# Altium PCB PCB1.PcbDoc
Units mil, origin at the board's own origin, x right, y up, seen from the top; angles counter-clockwise.
Board outline 3910 x 1560 mil, 2 copper layers (Top Layer, Bottom Layer); 44 components, 36 nets, 141 pads, 20 vias.
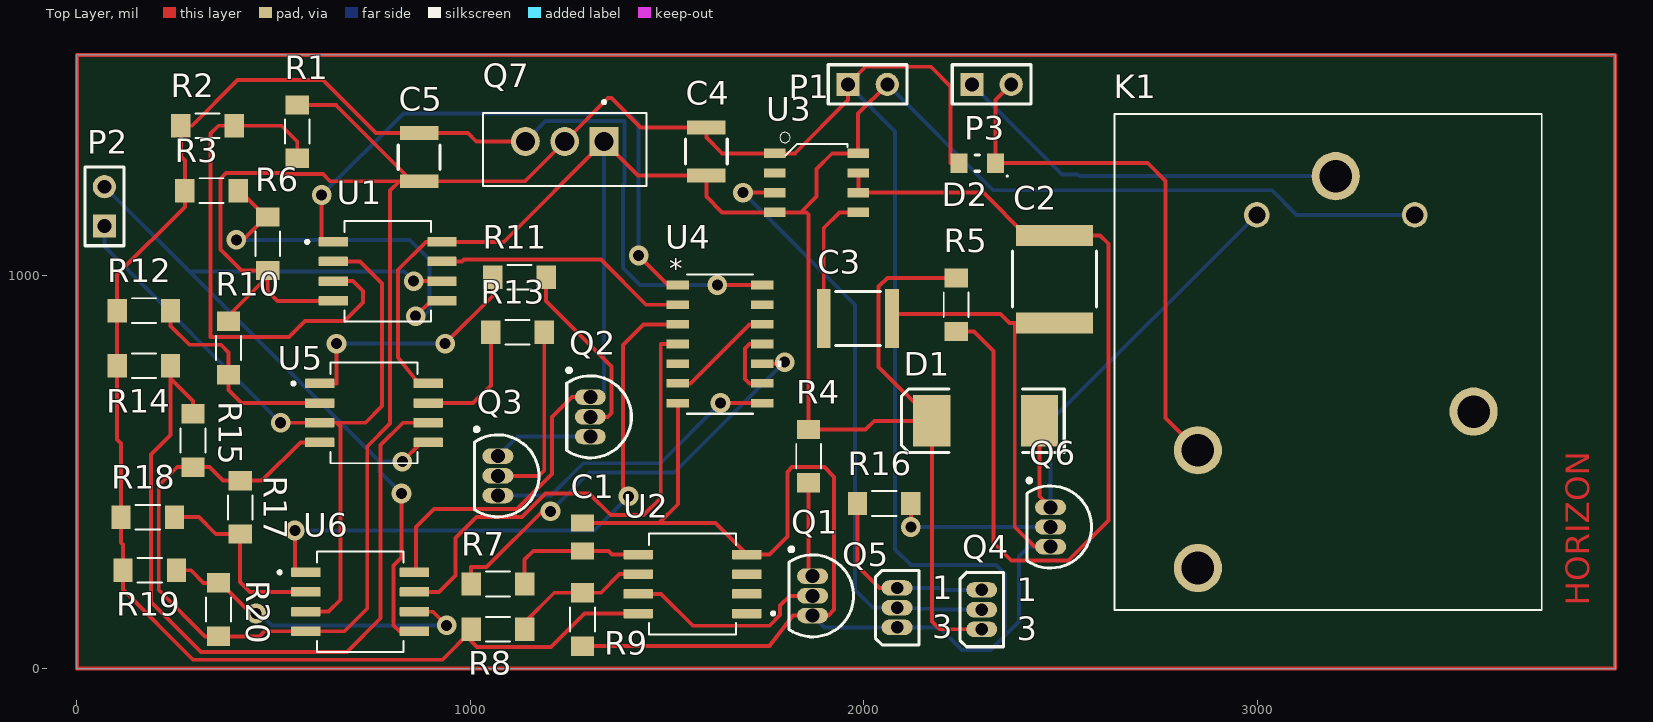
[diagram p0: Top Layer view]
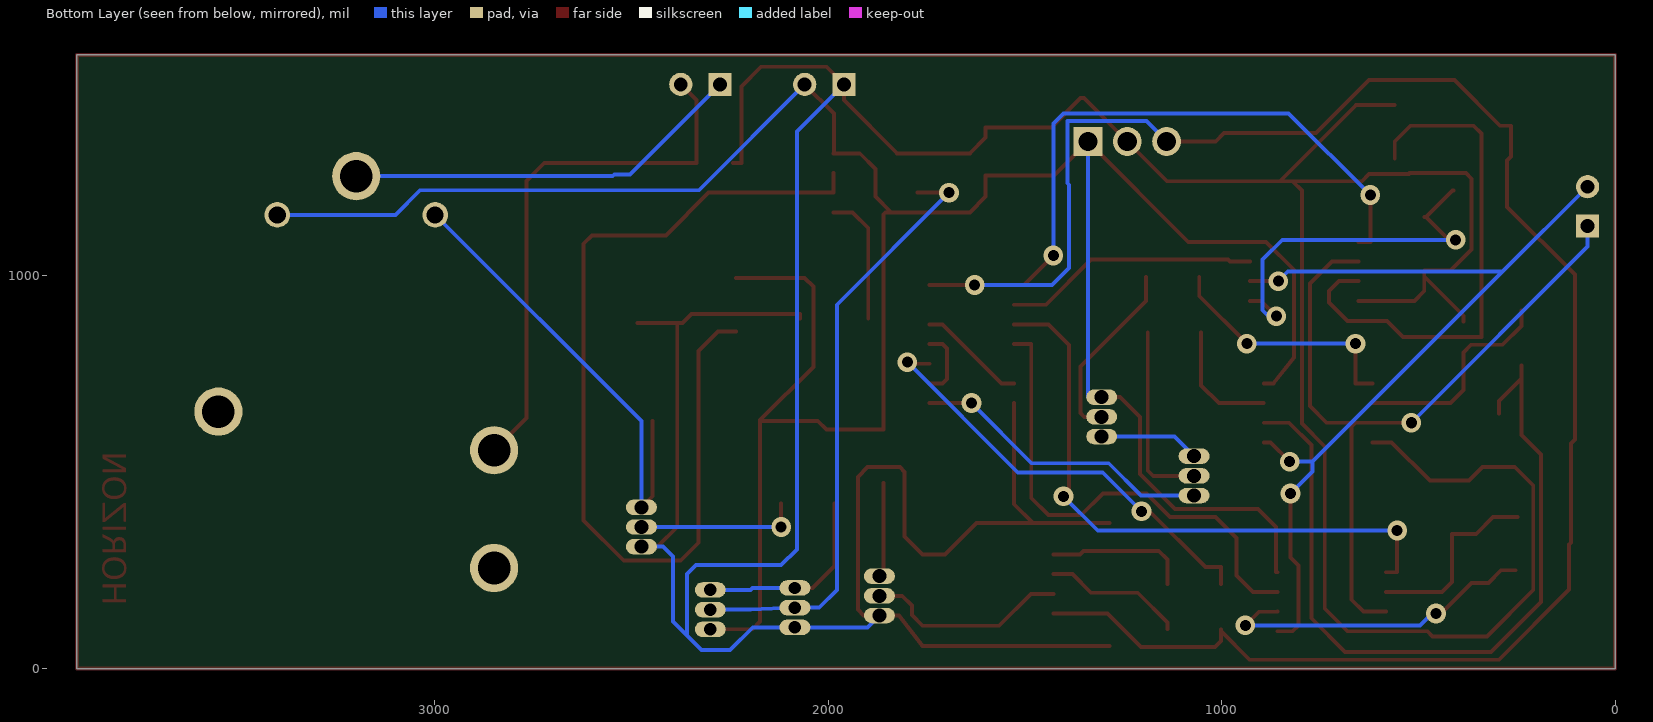
[diagram p1: Bottom Layer view, seen from below]
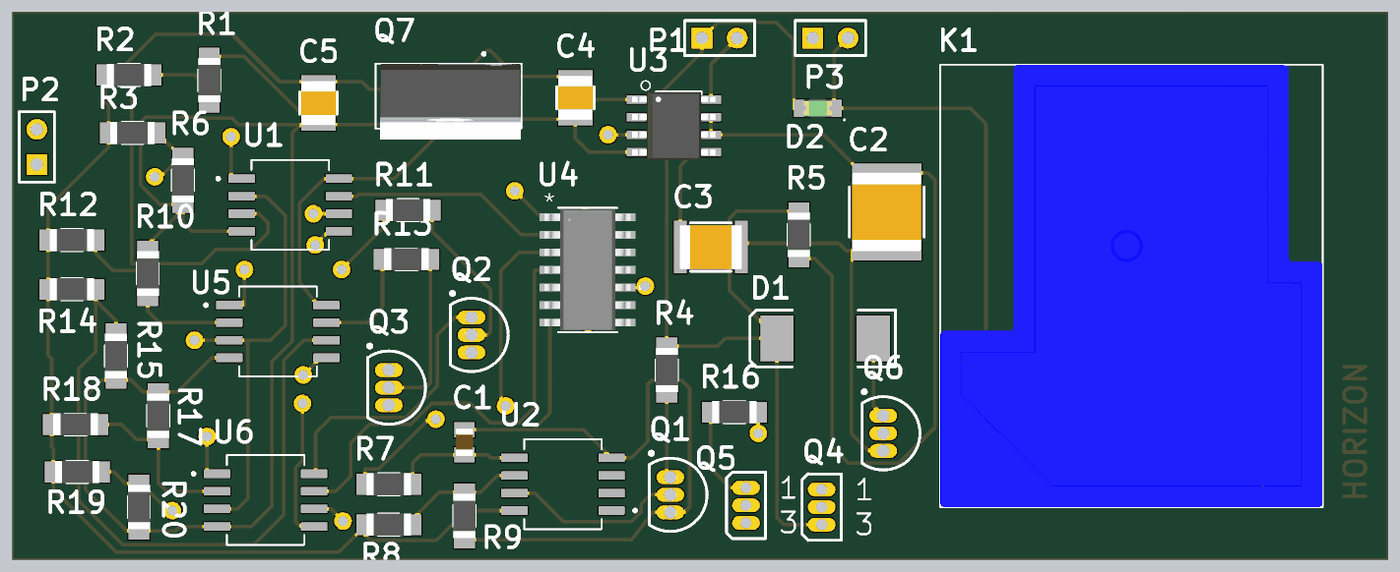
[diagram p2: 3D render of the assembled board from above, using the file's embedded part models]

## Layer stack, top to bottom
Top Solder: solder mask 0.4, Solder Resist, Dk 3.5
Top Layer: signal copper 1.4
Dielectric 1: dielectric 12.6, FR-4, Dk 4.8
Bottom Layer: signal copper 1.4
Bottom Solder: solder mask 0.4, Solder Resist, Dk 3.5

## Board outline
0,0 3910,0 3910,1560 0,1560

## Design rules (kind name [scope] priority, off if disabled: settings)
Clearance [All] p1: gap=10 ignorepadtopadclearanceinfootprint=FALSE
ComponentClearance [All] p1: gap=10 collisioncheckmode=3 verticalgap=0 showdistances=FALSE
PolygonConnect [All] p1: connectstyle=Relief reliefconductorwidth=10 reliefentries=4 polygonreliefangle="90 Angle" airgapwidth=10
RoutingVias [All] p1: holewidth=28 width=50 viastyle="Through Hole" minholewidth=28 minwidth=50 maxholewidth=28 maxwidth=50
SolderMaskExpansion [All] p1: expansion=4 istentingtop=FALSE
Width [All] p1: maxlimit=10 minlimit=10 preferedwidth=10
29 further rules are at their usual default settings.

## Components (designator, comment, footprint, x,y, rotation, side; value= is the part's Value field where it differs from the comment)
C1 "GRM21BR60J107ME15K" CAPC2012X145N 1285,334.57 r90 top
C2 "10uF" WCAP-CSGP_2220_L5.7W5H2.8 2485,990 r90 top
C3 "10nF" WCAP-CSGP_1812_L4.5W3.2H1.25 1985,890 r0 top
C4 "220nF" WCAP-CSGP_1210_L3.2W2.5H0.95 1600,1315 r270 top
C5 "100nF" WCAP-CSGP_1210_L3.2W2.5H0.95 870,1300 r90 top
D1 "Diode" SMC 2310,630 r180 top
D2 "Kingbright Green LED, 70 mcd 120 ° 0805" LED1913X12NGREEN 2288.74,1285 r180 top
K1 "SLA-12VDC-SL-C" RELAY_SLA-12VDC-SL-C 3200,555 r180 top
P1 "12v Header" HDR1X2 1960,1485 r0 top
P2 "Sensors Header" HDR1X2 70,1125 r90 top
P3 "BSPD out" HDR1X2 2275,1485 r0 top
Q1 "NPN" TO-226-AA 1870,185 r180 top
Q2 "NPN" TO-226-AA 1305,640 r180 top
Q3 "NPN" TO-226-AA 1070,490 r180 top
Q4 "PMOS" E3 2300,150 r0 top
Q5 "NMOS" E3 2085,155 r0 top
Q6 "NPN" TO-226-AA 2475,360 r180 top
Q7 "LM7805CT/NOPB" TO254P1054X470X1955-3 1240,1340 r180 top
R1 "ERJU08J274V" RES_ERJU08J274V 560,1365 r90 top
R2 "ERJU08J274V" RES_ERJU08J274V 332.09,1380 r0 top
R3 "ERJU08J274V" RES_ERJU08J274V 342.09,1215 r0 top
R4 "ERJU08J274V" RES_ERJU08J274V 1860,540 r90 top
R5 "ERJU08J274V" RES_ERJU08J274V 2235,925 r90 top
R6 "ERJU08J274V" RES_ERJU08J274V 485,1080 r270 top
R7 "ERJU08J274V" RES_ERJU08J274V 1070,215 r0 top
R8 "ERJU08J274V" RES_ERJU08J274V 1070,100 r0 top
R9 "ERJU08J274V" RES_ERJU08J274V 1285,125 r270 top
R10 "ERJU08J274V" RES_ERJU08J274V 385,815 r90 top
R11 "ERJU08J274V" RES_ERJU08J274V 1125,995 r0 top
R12 "ERJU08J274V" RES_ERJU08J274V 170,910 r0 top
R13 "ERJU08J274V" RES_ERJU08J274V 1120,855 r0 top
R14 "ERJU08J274V" RES_ERJU08J274V 170,770 r0 top
R15 "ERJU08J274V" RES_ERJU08J274V 295,580 r270 top
R16 "ERJU08J274V" RES_ERJU08J274V 2052.09,420 r180 top
R17 "ERJU08J274V" RES_ERJU08J274V 415,410 r90 top
R18 "ERJU08J274V" RES_ERJU08J274V 180,385 r0 top
R19 "ERJU08J274V" RES_ERJU08J274V 185,250 r0 top
R20 "ERJU08J274V" RES_ERJU08J274V 360,150 r270 top
U1 "LM358PSR" SOIC127P780X200-8N 790,1010 r0 top
U2 "LM358PSR" SOIC127P780X200-8N 1565,215 r180 top
U3 "CLOCK-NE555DR" SOIC8-1.27-5X4MM 1880,1235 r270 top
U4 "SN74HCS4075QDRQ1" SOIC14_D_TEX 1635,825 r0 top
U5 "LM358PSR" SOIC127P780X200-8N 755,650 r0 top
U6 "LM358PSR" SOIC127P780X200-8N 720,170 r0 top

## Footprints (in the part's own frame and the unit in brackets; to place one, negate y for a bottom-side part, rotate by r counter-clockwise, add the part's x,y. Pads: shape width x height; smd on the part's side, far side on the other; paste and mask are expansions set on the pad)
CAPC2012X145N [mm]
  rect 1.11x1.47 smd: 1(-0.9,0) 2(0.9,0)
  body extent -1,-0.63 1,0.63, height 1.45
E3 [mm] "TO, Flat Index; 3 In-Line, Axial Leads; Body Dia. 4.6mm; Lead Dia. 0.5 mm (max)"
  oval 2x1 hole 0.8: 1(0,1.27) 2(0,0) 3(0,-1.27)
  silkscreen extent -1.41,-2.41 1.41,2.41
HDR1X2 [mm] "Connector; Header; 2 Position"
  rect 1.5x1.5 hole 0.9: 1(0,0)
  round 1.5 hole 0.9: 2(2.54,0)
  silkscreen extent -1.27,-1.27 3.81,1.27
LED1913X12NGREEN [mm] "LED 2-Leads, Body 1.90x1.32mm, IPC Medium Density"
  rect 1.1x1.25 smd: 1(-1.175,0) 2(1.175,0)
  silkscreen extent -1.99,-0.53 0.15,0.89, body extent -1.01,-0.62 1.01,0.63, height 1.1
RELAY_SLA-12VDC-SL-C [mm]
  round 1.65 hole 1.1: C1(-5.1,-15.2) C2(5.1,-15.2)
  round 3.116 hole 2.1: COM1(0,-17.7) COM2(-8.9,-2.5) NC(8.9,7.6) NO(8.9,0)
  silkscreen extent -13.3,-21.7 14.3,10.3, body extent -13.3,-21.7 14.3,10.3, height 20.4
RES_ERJU08J274V [mm]
  rect 1.25x1.5 smd: 1(-1.725,0) 2(1.725,0)
  silkscreen extent -0.78,-0.8 0.78,0.8, body extent -1.6,-0.8 1.6,0.8, height 0.6
SMC [mm] "DO-214-AB/SMC; 2 C-Bend Leads; Body 7.9 x 5.9 mm, inc. leads (LxW)"
  rect 2.4x3.3 smd: 1(-3.475,0) 2(3.475,0)
  silkscreen extent -5.08,-2.05 5.42,2.06
SOIC8-1.27-5X4MM [mm]
  rect 0.6x1.4 smd: 1(-1.905,-2.7) 2(-0.635,-2.7) 3(0.635,-2.7) 4(1.905,-2.7) 5(1.905,2.7) 6(0.635,2.7) 7(-0.635,2.7) 8(-1.905,2.7)
  silkscreen extent -3.25,-2.36 -1.77,2, body extent -2.45,-3 2.45,3, height 1.75
SOIC14_D_TEX [mil]
  rect 57.5x22 smd paste+0 mask+0: 1(-107.25,150) 2(-107.25,100) 3(-107.25,50) 4(-107.25,0) 5(-107.25,-50) 6(-107.25,-100) 7(-107.25,-150) 8(107.25,-150) 9(107.25,-100) 10(107.25,-50) 11(107.25,0) 12(107.25,50) 13(107.25,100) 14(107.25,150)
  silkscreen extent -84,-177 156,177, body extent -122,-172 122,172, height 69
SOIC127P780X200-8N [mm]
  rrect15% 1.9x0.61 smd: 1(-3.505,1.905) 2(-3.505,0.635) 3(-3.505,-0.635) 4(-3.505,-1.905) 5(3.505,-1.905) 6(3.505,-0.635) 7(3.505,0.635) 8(3.505,1.905)
  silkscreen extent -5.3,-3.25 2.8,3.25
TO254P1054X470X1955-3 [mm]
  rect 1.86x1.86 hole 1.24: 1(-2.54,0)
  round 1.86 hole 1.24: 2(0,0) 3(2.54,0)
  silkscreen extent -5.27,-2.64 5.27,2.86, body extent -5.21,-2.56 4.95,3.67, height 15.59
TO-226-AA [mm] "TO, Flat Index; 3 In-Line, Axial Leads; Body Dia. 4.8mm; Leads 0.55 x 0.51 mm (max)"
  oval 2x1 hole 0.9: 1(0,-1.27) 2(0,0) 3(0,1.27)
  silkscreen extent -2.65,-3.13 1.52,2.65, body extent -2.65,-2.66 1.52,2.66, height 5.33
WCAP-CSGP_1210_L3.2W2.5H0.95 [mm] "Ceramic Capacitors, body 3.2x2.5mm"
  rect 0.9x2.5 smd: 1(-1.55,0) 2(1.55,0)
  silkscreen extent -0.8,-1.35 0.8,1.35, body extent -1.6,-1.25 1.6,1.25, height 0.95
WCAP-CSGP_1812_L4.5W3.2H1.25 [mm] "Ceramic Capacitors, body 4.5x3.2mm"
  rect 0.9x3.8 smd: 1(-2.2,0) 2(2.2,0)
  silkscreen extent -1.45,-1.75 1.45,1.75, body extent -2.25,-1.6 2.25,1.6, height 1.25
WCAP-CSGP_2220_L5.7W5H2.8 [mm] "Ceramic Capacitors, body 5.70x5.00mm"
  rect 1.35x5 smd: 1(-2.825,0) 2(2.825,0)
  silkscreen extent -1.8,-2.7 1.8,2.7, body extent -2.85,-2.5 2.85,2.5, height 2.8

## Part data
C1: "0805 100 uF 6.3 V Â±20% Tolerance X7S Multilayer Ceramic Chip Capacitor", Package="2012 Murata", Availability="In Stock", Check_prices=https://www.snapeda.com/parts/GRM21BR60J107ME15K/Murata%20Electronics%20North%20America/view-part/1845859/?ref=eda, MF="Murata Electronics", MP=GRM21BR60J107ME15K, Price=None, SnapEDA_Link=https://www.snapeda.com/parts/GRM21BR60J107ME15K/Murata%20Electronics%20North%20America/view-part/1845859/?ref=snap
C2: library part 885012214006, "WCAP-CSGP Multilayer Ceramic Chip Capacitor, General Purpose, size 2220, X7R Class II, 10uF, 100VDC", Capacitance Tolerance=+/-10%, Case/Size Code=2220, Insulation Resistance=0.01GOhm, Manufacturer="Wurth Elektronik", Operating Temperature Max=125°C, Operating Temperature Min=-55°C, Rated Voltage (DC)=100V, Capacitance=10uF, Category="Multilayer Ceramic Chip Capacitors", Ceramic Type="X7R Class II", ComponentLink1Description="Website Link", ComponentLink1URL=https://www.we-online.com/redexpert/article/885012214006?ad, ComponentLink2Description="Datasheet Link", ComponentLink2URL=https://www.we-online.com/redexpert/spec/885012214006?ad, Dissipation Factor=2.5%, Height=2.8mm, Length=5.7mm, Manufacturer Part Number=885012214006, Match Code=WCAP-CSGP, Mount="Surface Mount", Packaging="Tape and Reel", Technical Reference=X7R2220106K100DFCT10000, Width=5mm
C3: library part 885012210019, "WCAP-CSGP Multilayer Ceramic Chip Capacitor, General Purpose, size 1812, X7R, 10nF, 50VDC", Capacitance Tolerance=+/-10%, Case/Size Code=1812, Insulation Resistance=10GOhm, Manufacturer="Wurth Elektronik", Operating Temperature Max=125°C, Operating Temperature Min=-55°C, Rated Voltage (DC)=50V, Capacitance=10nF, Category="Multilayer Ceramic Chip Capacitors", Ceramic Type=X7R, ComponentLink1Description="Website Link", ComponentLink1URL=https://www.we-online.com/redexpert/article/885012210019?ad, ComponentLink2Description="Datasheet Link", ComponentLink2URL=https://www.we-online.com/redexpert/spec/885012210019?ad, Dissipation Factor=2.5%, Height=1.25mm, Length=4.5mm, Manufacturer Part Number=885012210019, Match Code=WCAP-CSGP, Mount="Surface Mount", Packaging="Tape and Reel", Technical Reference=X7R1812103K050DFCT10000, Width=3.2mm
C4: library part 885012209020, "WCAP-CSGP Multilayer Ceramic Chip Capacitor, General Purpose, size 1210, X7R, 220nF, 25VDC", Capacitance Tolerance=+/-10%, Case/Size Code=1210, Insulation Resistance=2.3GOhm, Manufacturer="Wurth Elektronik", Operating Temperature Max=125°C, Operating Temperature Min=-55°C, Rated Voltage (DC)=25V, Capacitance=220nF, Category="Multilayer Ceramic Chip Capacitors", Ceramic Type=X7R, ComponentLink1Description="Website Link", ComponentLink1URL=https://www.we-online.com/redexpert/article/885012209020?ad, ComponentLink2Description="Datasheet Link", ComponentLink2URL=https://www.we-online.com/redexpert/spec/885012209020?ad, Dissipation Factor=3.5%, Height=0.95mm, Length=3.2mm, Manufacturer Part Number=885012209020, Match Code=WCAP-CSGP, Mount="Surface Mount", Packaging="Tape and Reel", Technical Reference=X7R1210224K025DFCT10000, Width=2.5mm
C5: library part 885012209019, "WCAP-CSGP Multilayer Ceramic Chip Capacitor, General Purpose, size 1210, X7R, 100nF, 25VDC", Capacitance Tolerance=+/-10%, Case/Size Code=1210, Insulation Resistance=5GOhm, Manufacturer="Wurth Elektronik", Operating Temperature Max=125°C, Operating Temperature Min=-55°C, Rated Voltage (DC)=25V, Capacitance=100nF, Category="Multilayer Ceramic Chip Capacitors", Ceramic Type=X7R, ComponentLink1Description="Website Link", ComponentLink1URL=https://www.we-online.com/redexpert/article/885012209019?ad, ComponentLink2Description="Datasheet Link", ComponentLink2URL=https://www.we-online.com/redexpert/spec/885012209019?ad, Dissipation Factor=3.5%, Height=0.95mm, Length=3.2mm, Manufacturer Part Number=885012209019, Match Code=WCAP-CSGP, Mount="Surface Mount", Packaging="Tape and Reel", Technical Reference=X7R1210104K025DFCT10000, Width=2.5mm
D1: "Default Diode", Code_JEDEC=DO-214-AB, LatestRevisionDate=17-Jul-2002, LatestRevisionNote="Re-released for DXP Platform.", PackageDescription="DO-214-AB/SMC; 2 C-Bend Leads; Body 7.9 x 5.9 mm, inc. leads (LxW)", PackageReference=SMC, PackageVersion=Sep-1996, Published=8-Jun-2000, Publisher="Altium Limited"
D2: Color=Green, Forward Voltage="2.1 V", Manufacturer=KingBright, Manufacturer Part No.=KP-2012MGC, Creator="Ritesh Kanjee", Datasheet URL=http://za.rs-online.com/web/p/visible-leds/4663778/, Date Created="18 February 2015", RS Stock No.=466-3778
K1: "SUBMINATURE HIGH POWER RELAY", Package=None, Availability="Not in stock", Check_prices=https://www.snapeda.com/parts/SLA-12VDC-SL-C/Songle+Relay/view-part/?ref=eda, MF="Songle Relay", MP=SLA-12VDC-SL-C, Price=None, SnapEDA_Link=https://www.snapeda.com/parts/SLA-12VDC-SL-C/Songle+Relay/view-part/?ref=snap
P1 P2 P3: library part "Header 2", "Header, 2-Pin", LatestRevisionDate=17-Jul-2002, LatestRevisionNote="Re-released for DXP Platform.", Publisher="Altium Limited"
Q1 Q2 Q3 Q6: "NPN Bipolar Transistor", Code_JEDEC=TO-226-AA, LatestRevisionDate=17-Jul-2002, LatestRevisionNote="Re-released for DXP Platform.", PackageDescription="TO, Flat Index; 3 In-Line, Axial Leads; Body Dia. 4.8mm; Leads 0.55 x 0.51 mm (max)", PackageReference=TO-226-AA, Published=8-Jun-2000, Publisher="Altium Limited"
Q4: library part MOSFET-P, "P-Channel MOSFET", LatestRevisionDate=17-Jul-2002, LatestRevisionNote="Re-released for DXP Platform.", PackageDescription="TO, Flat Index; 3 In-Line, Axial Leads; Body Dia. 4.6mm; Lead Dia. 0.5 mm (max)", PackageReference=E3, PackageVersion=1995/1996, Published=8-Jun-2000, Publisher="Altium Limited"
Q5: library part MOSFET-N, "N-Channel MOSFET", LatestRevisionDate=17-Jul-2002, LatestRevisionNote="Re-released for DXP Platform.", PackageDescription="TO, Flat Index; 3 In-Line, Axial Leads; Body Dia. 4.6mm; Lead Dia. 0.5 mm (max)", PackageReference=E3, PackageVersion=1995/1996, Published=8-Jun-2000, Publisher="Altium Limited"
Q7: Package=None, Availability=Unavailable, MP=LM7805CT/NOPB, Price=None
R1 R2 R3 R4 R5 R6 R7 R8 R9 R10 R11 R12 R13 R14 R15 R16 R17 R18 R19 R20: "1206 anti-sulfurated resistor 1206 Anti-Sulfurated", Package="3216-2 Panasonic", Check_prices=https://www.snapeda.com/parts/ERJ-U08J274V/Panasonic/view-part/?ref=eda, MF=Panasonic, MP=ERJ-U08J274V, SnapEDA_Link=https://www.snapeda.com/parts/ERJ-U08J274V/Panasonic/view-part/?ref=snap
U1 U2 U5 U6: "General Purpose Amplifier 2 Circuit 8-SO", Package="SO-8 Texas Instruments", Availability=Unavailable, MF="Texas Instruments", MP=LM358PSR, Price=None, SnapEDA_Link=https://www.snapeda.com/parts/LM358PSR/Texas%20Instruments/view-part/501080/?ref=snap
U3: library part CLOCK-NE555DR(SOIC8), "Single Precision Timer", Package="SOIC-8 Texas Instruments", Check_prices=https://www.snapeda.com/parts/NE555DR/Texas+Instruments/view-part/?ref=eda, MF="Texas Instruments", MP=NE555DR, SnapEDA_Link=https://www.snapeda.com/parts/NE555DR/Texas+Instruments/view-part/?ref=snap
U4: "No Description Available", Mfr_Name="Texas Instruments", RefDes=RefDes, Type=Logic

## Via types
v1: diameter 50, hole 28, Top Layer to Bottom Layer, 20 vias

## Nets (pads, with @x,y where several pads share a name; then routed paths per layer and width w, separated by ;. In a path a pad name is that pad's centre, name@x,y a point inside that pad or via, vN(x,y) a via of type N, cw(c..) or ccw(c..) an arc to the next point about the centre after c; other vN are vias at no path point)
+5: C5.2 Q7.3 R2.1 R3.1 R8.1 R12.1 R14.1 R18.1 R19.1 U2.8 U4.14 | length 4760.2
  Top Layer w10: Q7.3 1015.02,1340 994,1361.02 C5.2 760,1361.02 625.02,1496 408,1496 292,1380 R2.1 264.17,1302 274.17,1292 R3.1 274.17,1173.91 102.09,1001.83 R12.1 R14.1 102.09,582 112.09,572 R18.1 112.09,320 117.09,315 R19.1 117.09,200.86 295.47,22.48 929.49,22.48 1002.09,95.08 R8.1 1002.09,70 1017.09,55 1205,55 1290,140 U2.8 ; v1(1628,975) U4.14
  Bottom Layer w10: Q7.3 1191.62,1391.62 1392,1391.62 1392,1234 1388,1230 1388,1018 1431,975 v1(1628,975)
+12: C4.2 D1.2 K1.C1 P1.2 Q2.1 Q4.3 Q7.1 R4.2 R5.2 U1.8 U3.4 U3.8 U5.8 U6.8 | length 7138.8
  Top Layer w10: U6.8 862,245 862,360 907.31,405.31 1118.31,405.31 1208,495 1208,640 1258,690 Q2.1 ; U5.8 868,725 816,791 816,1014 887,1085 U1.8 1085,1085 Q7.1 1426.02,1253.98 C4.2 ; C4.2 1600.05,1200 1640.05,1160 U3.4 1840,1160 ; U3.8 U3.8@1986,1310 ; P1.2 1986,1411 U3.8@1986,1310 ; R5.2 2060,992.91 2038,970.91 2038,766.81 2173.19,631.62 D1.2 ; Q4.3 2193,100 2173.19,119.81 D1.2 ; 1840,1160 1880,1200 1880,1270 1920,1310 U3.8@1986,1310 ; 1840,1160 1855,1160 1860,1155 R4.2 2005,607.91 2027.09,630 D1.2
  Bottom Layer w10: Q2.1 1340,690 Q7.1 ; P1.2 2329,1216 3038,1216 3100.57,1153.43 K1.C1
BPs: P2.2 U1.6 U5.5 U6.5 | length 2291.4
  Top Layer w10: v1(825,445) 825,282.09 805,262.09 805,110 820,95 U6.5 ; v1(827,526) 876,575 U5.5 ; v1(856,985) U1.6
  Bottom Layer w10: P2.2 286,1009 ; v1(825,445) 769,501 769,526 ; v1(827,526) 769,526 ; v1(856,985) 832,1009 286,1009 ; 286,1009 769,526
Cs: P2.1 U1.2 U5.3 U6.3 | length 1974.1
  Top Layer w10: v1(518,625) U5.3 660,625 ; U6.3 640,145 670,175 670,615 660,625 ; U1.2 720,1035 776,979 776,668 733,625 660,625
  Bottom Layer w10: P2.1 70,1073 v1(518,625)
GND: C1.2 C2.1 C3.2 C4.1 C5.1 D2.2 P1.1 Q1.3 Q5.3 Q6.3 Q7.2 R1.2 R6.2 R9.2 R10.2 R15.2 R17.2 R20.2 U1.4 U2.4 U3.1 U4.7 U5.4 U6.4 | length 11760
  Top Layer w10: R10.2 385,897 R6.2@485,997 ; R1.2 658,1432.91 C5.1@851.94,1238.98 ; U5.4 568,575 470.91,477.91 R17.2 371.17,477.91 337,512.09 R15.2 255.09,512.09 208,465 208,200 325.91,82.09 R20.2 464,82.09 476.91,95 U6.4 680,95 738,153 738,565 796,623 796,1214.98 820,1238.98 ; U1.4 510,935 485,960 R6.2@485,997 ; R9.2 1760,57.09 1820,135 Q1.3 1910,135 1925,150 1925,487 1900,512 1818,512 1806,500 1806,336 1760,290 U2.4 1622.99,370 1480,370 ; C1.2 1480,370 ; U4.7 1527.75,417.75 1480,370 ; C3.2 2071.61,901 2348,901 2370.22,878.78 2384,878.78 ; D2.2 2221,1285 2221,1480 2171,1530 2005,1530 P1.1 1960,1445 1825,1310 U3.1 1640,1310 1600,1350 C4.1 1433,1376.02 1359.02,1450 1350,1450 Q7.2 1138.98,1238.98 C5.1 C5.1@851.94,1238.98 ; Q6.3 2434,310 2384,360 2384,878.78 ; C2.1 2384,878.78 ; R6.2@485,997 R6.2 418,1012.09 365,1065.09 365,1245.35 379.18,1259.53 522.21,1259.53 524.26,1257.48 625.09,1257.48 643.59,1238.98 820,1238.98 ; 820,1238.98 C5.1@851.94,1238.98
  Bottom Layer w10: Q1.3 1900,105 Q5.3 2192,105 2250,47 2322,47 2359,84 ; P1.1 2080,1365 2080,303 2120,263 2336,263 2359,240 2359,84 ; Q6.3 2420,310 2395,285 2395,120 2359,84
input: R7.1 U4.10 | length 1114.2
  Top Layer w10: R7.1 1002.09,258.09 1041.26,258.09 1183.17,400 v1(1204,400) ; U4.10 1795,775 v1(1799,779)
  Bottom Layer w10: v1(1204,400) 1302.41,498.41 1518.41,498.41 v1(1799,779)
NetC1_1: C1.1 R7.2 U2.5 | length 364.1
  Top Layer w10: R7.2 1137.91,277.05 1160,299.13 C1.1 1351,299.13 1360.13,290 U2.5
NetC2_2: C2.2 R5.1 U3.6 U3.7 | length 2398.2
  Top Layer w10: U3.7 U3.6 2304.22,1210 2413,1101.22 C2.2 2600.78,1101.22 2622,1080 2622,377 2520,275 2375,275 2330,320 2330,807.09 2280,857.09 R5.1
NetC3_1: C3.1 U3.5 | length 334.5
  Top Layer w10: C3.1 1898.39,1120 1938.39,1160 U3.5
NetD1_1: D1.1 K1.C2 Q6.1 | length 1192.2
  Top Layer w10: D1.1 2446.81,438.19 Q6.1
  Bottom Layer w10: Q6.1 2475,629.21 K1.C2
NetD2_1: D2.1 K1.NO P3.2 | length 1386.4
  Top Layer w10: P3.2 2335,1445 D2.1 2722,1285 2767,1240 2767,637.61 K1.NO
NetK1_COM1: K1.COM1 P3.1 | length 1021.6
  Bottom Layer w10: P3.1 2503.71,1256.29 2543.71,1256.29 2548.15,1251.85 K1.COM1
NetQ1_1: Q1.1 R4.1 | length 247.1
  Top Layer w10: R4.1 1860,235 Q1.1
NetQ1_2: Q1.2 U2.7 | length 522.1
  Top Layer w10: U2.7 1485,190 1566,109 1760,109 1787,136 1787,160 1812,185 Q1.2
NetQ2_2: Q2.2 R11.2 | length 472.5
  Top Layer w10: R11.2 1192.91,934.61 1359.37,768.15 1359.37,650 1349.37,640 Q2.2
NetQ2_3: Q2.3 Q3.1 | length 255.7
  Bottom Layer w10: Q3.1 1120,590 Q2.3
NetQ3_2: Q3.2 R13.2 | length 474.8
  Top Layer w10: Q3.2 1174,490 1187.91,503.91 R13.2
NetQ3_3: Q3.3 U4.8 | length 769.6
  Top Layer w10: v1(1636,675) U4.8
  Bottom Layer w10: Q3.3 1204.88,440 1287,522.12 1483.12,522.12 v1(1636,675)
NetQ4_1: Q4.1 Q5.1 R16.2 | length 500.2
  Top Layer w10: R16.2 1984.17,260.83 2040,205 Q5.1
  Bottom Layer w10: Q5.1 2193,205 2198,200 Q4.1
NetQ6_2: Q6.2 R16.1 | length 415
  Top Layer w10: v1(2120,360) R16.1
  Bottom Layer w10: v1(2120,360) Q6.2
NetR1_1: R1.1 R2.2 U1.3 | length 1342.1
  Top Layer w10: R1.1 560,1340 520,1380 R2.2 360,1380 340,1360 340,843.31 539.31,843.31 580,884 680,884 727,931 727,960 702,985 U1.3
NetR3_2: R3.2 R6.1 U1.5 | length 971.8
  Top Layer w10: v1(405,1090) 412.65,1097.65 429.82,1097.65 R6.1@480.08,1147.91 ; R3.2 413,1215 R6.1@480.09,1147.91 ; v1(861,896) 900,935 U1.5 ; R6.1@480.08,1147.91 R6.1 R6.1@480.09,1147.91
  Bottom Layer w10: v1(405,1090) 846,1090 896,1040 896,911 881,896 v1(861,896)
NetR8_2: R8.2 R9.1 U2.6 | length 357.4
  Top Layer w10: R8.2 1137.91,117.54 1213.29,192.91 R9.1 1332,192.91 1379.09,240 U2.6
NetR10_1: R10.1 R12.2 U5.2 | length 555.5
  Top Layer w10: R12.2 237.91,871.09 285.69,823.31 365.69,823.31 385,804 R10.1 385,708 418,675 U5.2
NetR11_1: R11.1 U5.1 | length 639.1
  Top Layer w10: U5.1 660,725 v1(660,826) ; v1(936,826) 1057.09,947.09 R11.1
  Bottom Layer w10: v1(660,826) v1(936,826)
NetR13_1: R13.1 U5.7 | length 312.7
  Top Layer w10: U5.7 1007.09,675 1052.09,720 R13.1
NetR14_2: R14.2 R15.1 U5.6 | length 1990.6
  Top Layer w10: R14.2 237.91,737.09 ; R15.1 295,680 237.91,737.09 ; U5.6 829,625 772,568 772,128 686.48,42.48 315,42.48 188,169.48 188,544 237.91,593.91 237.91,737.09
NetR17_1: R17.1 R18.2 U6.2 | length 484.3
  Top Layer w10: R18.2 310,385 352.91,342.09 R17.1 415,220 440,195 U6.2
NetR19_2: R19.2 R20.1 U6.6 | length 841.6
  Top Layer w10: R19.2 290,250 322.09,217.91 364.92,217.91 435.18,147.65 447.35,147.65 v1(455,140) ; U6.6 858.36,144.63 905.37,144.63 v1(940,110)
  Bottom Layer w10: v1(455,140) 465.82,140 495.82,110 v1(940,110)
NetU1_1: U1.1 U4.1 | length 1518.3
  Top Layer w10: v1(622,1204) 622,1085 U1.1 ; v1(1428,1050) 1503,975 U4.1
  Bottom Layer w10: v1(622,1204) 829.62,1411.62 1402.1,1411.62 1428,1385.71 v1(1428,1050)
NetU1_7: U1.7 U4.2 | length 649.5
  Top Layer w10: U1.7 979,1035 984,1040 1332,1040 1447,925 U4.2
NetU4_3: U4.3 U6.1 | length 1570.1
  Top Layer w10: v1(554,351) 554,245 U6.1 ; v1(1402,438) 1388,452 1388,823 1440,875 U4.3
  Bottom Layer w10: v1(554,351) 1315,351 v1(1402,438)
NetU4_4: U4.4 U6.7 | length 1261
  Top Layer w10: U6.7 920,195 962,237 962,332 1015.31,385.31 1131.31,385.31 1191,445 1302,445 1357,390 1440,390 1484,434 1484,825 U4.4
NetU4_6: U4.6 U4.12 | length 276.6
  Top Layer w10: U4.6 1560,725 1710,875 U4.12
NetU4_9: U4.9 U4.11 | length 174
  Top Layer w10: U4.9 1710,725 1698.5,736.5 1698.5,813.5 1710,825 U4.11
output: Q4.2 Q5.2 U3.3 | length 1549.5
  Top Layer w10: v1(1693,1210) U3.3
  Bottom Layer w10: v1(1693,1210) 1978,925 1978,200 2023,155 Q5.2 2198,150 Q4.2
pads on no net: K1.COM2 K1.NC U2.1 U2.2 U2.3 U3.2 U4.5 U4.13
copper on no net: | length 10940
  Top Layer w10: 0,0 0,1560 3910,1560 3910,0 0,0

## Other copper
Top Layer:
  text "HORIZON" at 3845,160 h60 r90

## Text inside footprints (layer, text, board x,y; h text height)
Q4: Top Overlay "1" at 2389.57,171.85 h59.05; Top Overlay "3" at 2389.57,72.72 h59.05
Q5: Top Overlay "1" at 2174.57,176.85 h59.05; Top Overlay "3" at 2174.57,77.72 h59.05
U4: Top Overlay "*" at 1505.25,992 h50; Mechanical 13 "*" at 1559,944 h50